# Altium PCB mdm3.PcbDoc (part 3 of 3)
Units mil, origin at the board's own origin, x right, y up, seen from the top; angles counter-clockwise.
Board outline 3925 x 3925 mil, 2 copper layers (TopLayer, BottomLayer); 80 components, 90 nets, 713 pads, 10 vias.
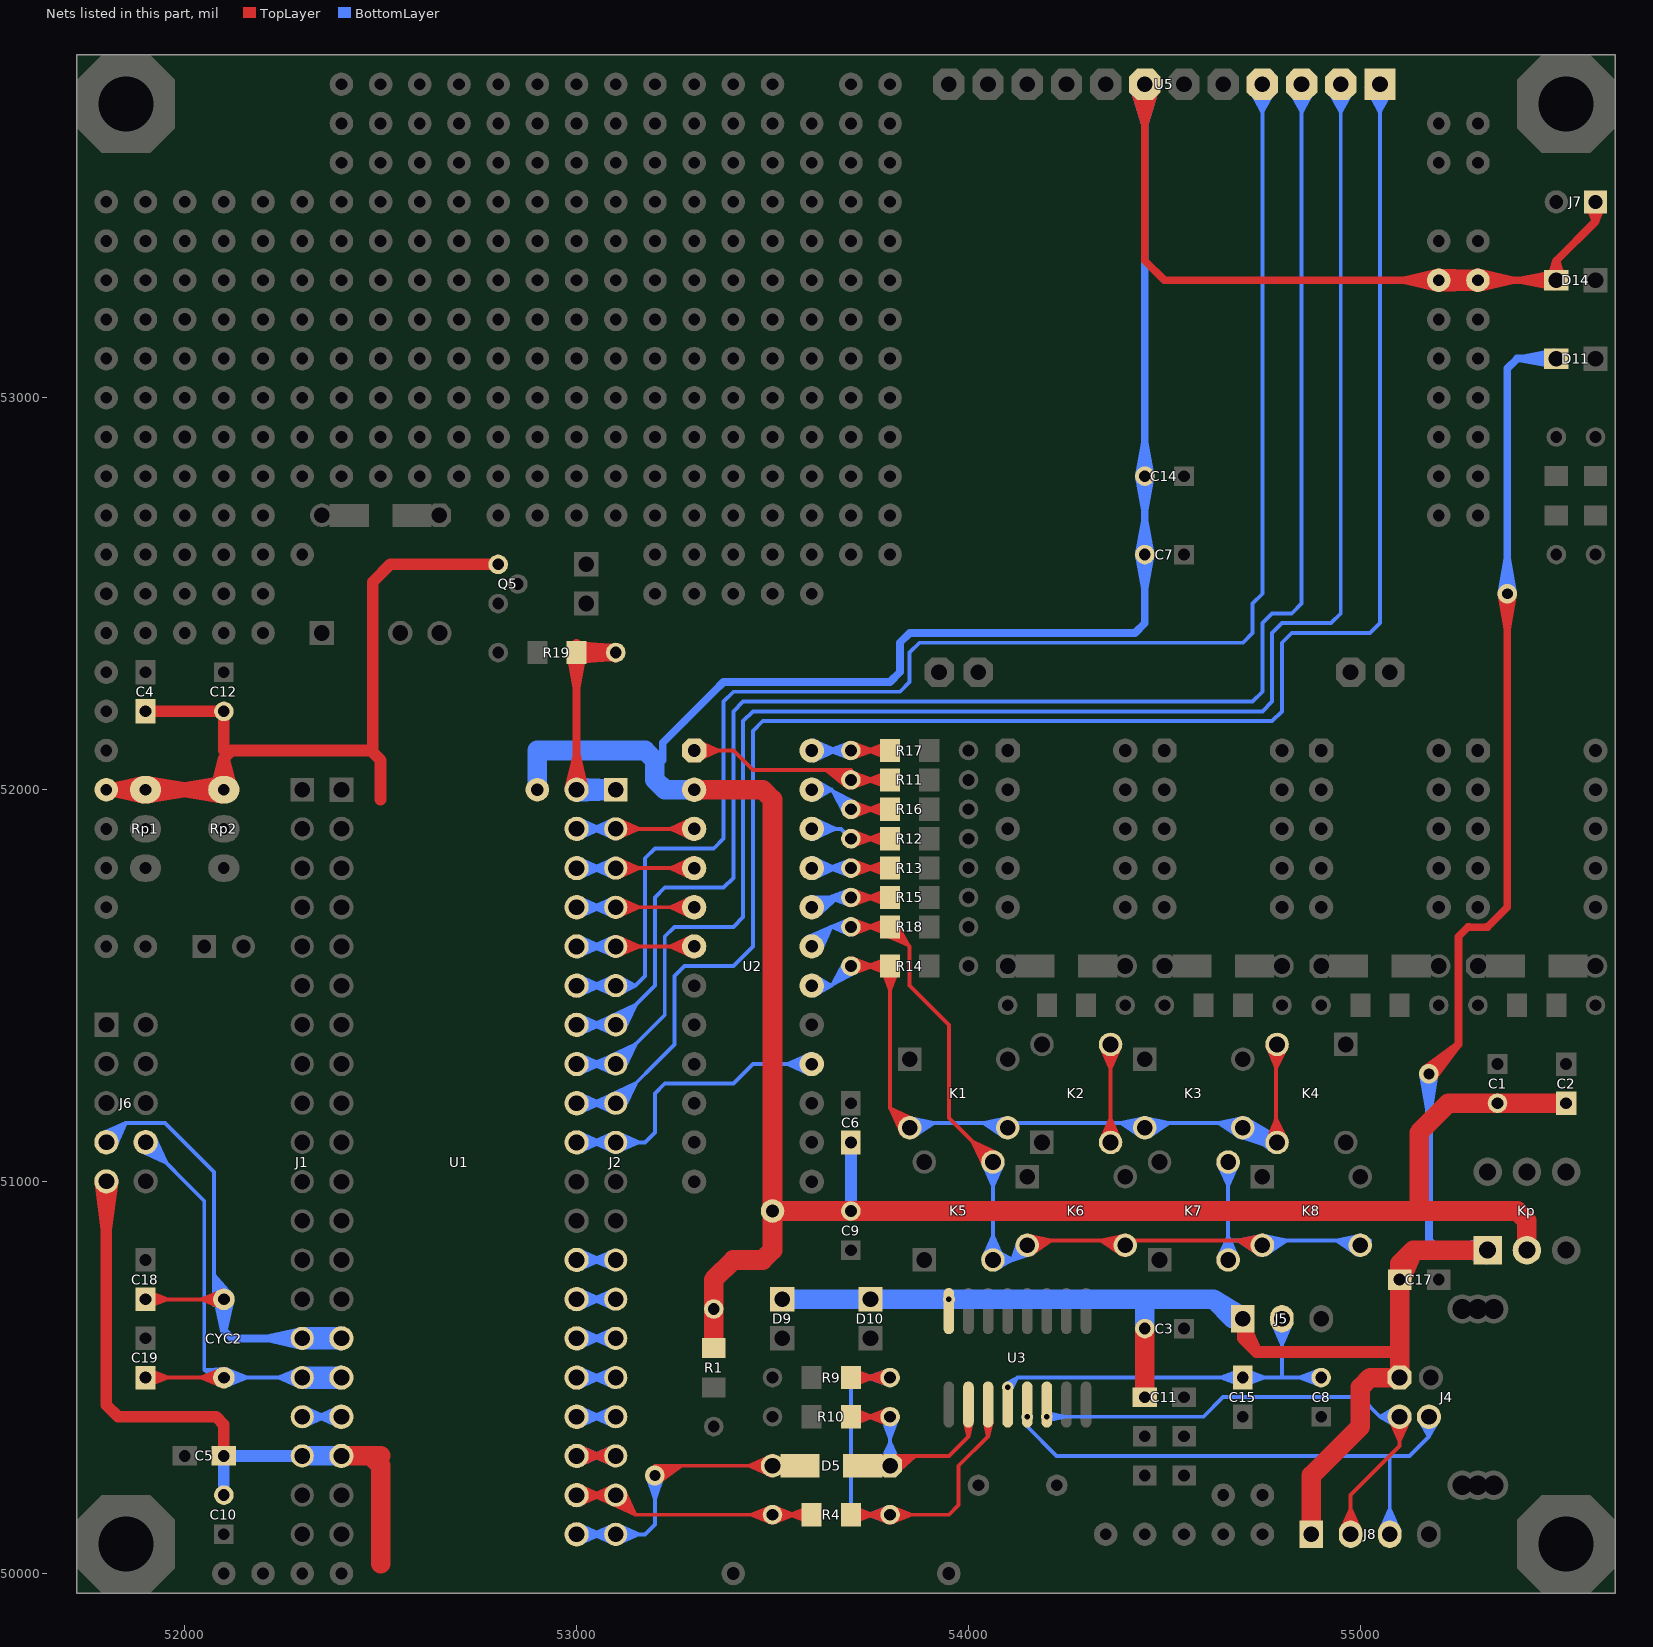
[diagram p3: the nets of this part, all layers, seen from the top]

## Via types
v1: diameter 30, hole 14, TopLayer to BottomLayer, 5 vias
v2: diameter 50, hole 28, TopLayer to BottomLayer, 5 vias

## Nets (pads, with @x,y where several pads share a name; then routed paths per layer and width w, separated by ;. In a path a pad name is that pad's centre, name@x,y a point inside that pad or via, vN(x,y) a via of type N, cw(c..) or ccw(c..) an arc to the next point about the centre after c; other vN are vias at no path point) (continued)
P16: C18.1 CYC2.2 J1.15 J6.7 U1.15 | length 3925
  TopLayer w10: C18.1@51900,50700 51956,50699.55 ; C18.1@51900.45,50699.55 CYC2.2@52100.07,50699.55 ; C18.1@51900.99,50689.04 51956,50699.55 ; C18.1@51901.17,50710.94 51956,50699.55 ; C18.1@51903.77,50679.34 51956,50699.55 ; C18.1@51904.1,50720.6 51956,50699.55 ; CYC2.2@52095.67,50677.48 52042.57,50699.55 ; CYC2.2@52095.67,50721.62 52042.57,50699.55 ; CYC2.2@52098.71,50687.12 52042.57,50699.55 ; CYC2.2@52098.71,50711.98 52042.57,50699.55
  BottomLayer w10: J6.7@51785.72,51122.03 51849.5,51149.5 ; J6.7@51790.38,51113.06 51849.5,51149.5 ; J6.7@51796.24,51104.93 51849.5,51149.5 ; J6.7@51800.21,51100 51800,51100 51849.5,51149.5 ; J6.7@51800.29,51100.5 51849.5,51149.5 ; J6.7@51804.7,51096.43 51849.5,51149.5 ; J6.7@51812.81,51090.54 51849.5,51149.5 ; J6.7@51821.76,51085.84 51849.5,51149.5 ; 52075,50685 52075,50825 52075,51025 52074.5,51025 51950,51149.5 51849.5,51149.5 ; CYC2.2@52078.09,50694.73 52075,50761.38 ; CYC2.2@52088.1,50695.96 52075,50761.38 ; CYC2.2@52100.07,50699.55 52075,50761.38 ; CYC2.2@52111.16,50705.31 52075,50761.38 ; CYC2.2@52119.2,50711.4 52075,50761.38
  BottomLayer w20: CYC2.2@52082.68,50697.63 52100.07,50619.93 ; CYC2.2@52117.46,50697.63 52100.07,50619.93 ; J1.15@52297.87,50580.59 52210.47,50600 J1.15@52297.87,50619.41 ; J1.15@52298.05,50580.57 U1.15@52388.31,50581.32 ; J1.15@52298.05,50619.43 U1.15@52388.31,50618.68 ; J1.15@52302.13,50580.59 52389.53,50600 J1.15@52302.13,50619.41 ; J1.15@52306.08,50581.44 U1.15@52388.31,50618.68 ; J1.15@52306.08,50618.56 U1.15@52388.31,50581.32 ; U1.15@52397.58,50579.14 52309,50600 U1.15@52397.58,50620.86 ; U1.15@52400,50600 J1.15@52300,50600 ; 52100.07,50619.93 CYC2.2@52100.07,50699.55 52100.07,50619.93 ; 52100.07,50619.93 52120,50600 J1.15@52300,50600 ; J1.15@52300,50600 U1.15@52388.31,50618.68 ; J1.15@52300,50600 U1.15@52388.31,50581.32
P17: C19.1 CYC2.1 J1.16 J6.8 U1.16 | length 3939.6
  TopLayer w10: C19.1@51900,50500 52099.62,50500 CYC2.1@52100.07,50499.55 52042.57,50500 ; C19.1@51901.08,50489.05 51956,50500 ; C19.1@51901.08,50510.95 51956,50500 ; C19.1@51903.94,50479.37 51956,50500 ; C19.1@51903.94,50520.63 51956,50500 ; CYC2.1@52095.5,50477.52 52042.57,50500 ; CYC2.1@52095.84,50521.65 52042.57,50500 ; CYC2.1@52098.61,50487.14 52042.57,50500 ; CYC2.1@52098.81,50511.99 52042.57,50500
  BottomLayer w10: J6.8@51885.43,51079.17 51952.5,51048.29 ; J6.8@51890.27,51088.03 51952.5,51048.29 ; J6.8@51896.22,51096.09 51952.5,51048.29 ; J6.8@51900,51100 J6.8@51900.79,51100 ; J6.8@51904.7,51104.57 51952.5,51048.29 ; J6.8@51912.76,51110.52 51952.5,51048.29 ; J6.8@51921.62,51115.36 51952.5,51048.29 ; 52050,50800 52050,50810 ; CYC2.1@52087.42,50480.95 52050,50520 ; CYC2.1@52094.04,50488.6 52050,50520 ; CYC2.1@52101.33,50511.99 52157.57,50500 ; CYC2.1@52101.53,50487.14 52157.57,50500 ; CYC2.1@52103.43,50511.59 52050,50520 ; CYC2.1@52104.06,50521.69 52050,50520 ; CYC2.1@52104.3,50521.65 52157.57,50500 ; CYC2.1@52104.64,50477.52 52157.57,50500 ; J1.16@52294.95,50476 52240.47,50500 ; J1.16@52294.95,50524 52240.47,50500 ; J1.16@52298.23,50485.58 52240.47,50500 ; J1.16@52298.23,50514.42 52240.47,50500 ; J1.16@52300,50500 CYC2.1@52099.62,50500 ; J6.8@51900.79,51100 52050,50950.79 52050,50810 ; J6.8@51900.79,51100 J6.8@51900.29,51100.5 51952.5,51048.29 ; 52050,50520 CYC2.1@52100.07,50499.55 ; 52050,50520 52070,50500 CYC2.1@52099.62,50500 ; 52050,50520 52050,50810 ; CYC2.1@52099.62,50500 CYC2.1@52100.07,50499.55 ; CYC2.1@52100.07,50499.55 52157.57,50500
  BottomLayer w20: J1.16@52298.05,50480.57 U1.16@52388.31,50481.32 ; J1.16@52298.05,50519.43 U1.16@52388.31,50518.68 ; J1.16@52302.13,50480.59 52389.53,50500 J1.16@52302.13,50519.41 ; J1.16@52306.08,50481.44 U1.16@52388.31,50518.68 ; J1.16@52306.08,50518.56 U1.16@52388.31,50481.32 ; U1.16@52397.58,50479.14 52309,50500 U1.16@52397.58,50520.86 ; U1.16@52400,50500 J1.16@52300,50500 ; J1.16@52300,50500 U1.16@52388.31,50481.32 ; J1.16@52300,50500 U1.16@52388.31,50518.68
P20: J2.9 U1.32 U5.1 | length 5770.8
  BottomLayer w10: U1.32@53000,51200 J2.9@53100,51200 53250,51350 53250,51525 53275,51550 53400,51550 53450,51600 53450,52025 53450,52150 53475,52175 54775,52175 54800,52200 54800,52375 54825,52400 55025,52400 55050,52425 U5.1@55050,53800 ; U1.32@53000.3,51194.01 53061,51200 ; U1.32@53000.3,51205.99 53061,51200 ; U1.32@53002.1,51184.14 53061,51200 ; U1.32@53002.1,51215.86 53061,51200 ; U1.32@53005.54,51174.6 53061,51200 ; U1.32@53005.54,51225.4 53061,51200 ; J2.9@53085.88,51220.05 53150.74,51250.74 ; J2.9@53090.82,51211.26 53150.74,51250.74 ; J2.9@53094.95,51176 53040.47,51200 ; J2.9@53094.95,51224 53040.47,51200 ; J2.9@53098.23,51185.58 53040.47,51200 ; J2.9@53098.23,51214.42 53040.47,51200 ; J2.9@53111.26,51190.82 53150.74,51250.74 ; J2.9@53120.05,51185.88 53150.74,51250.74 ; U5.1@55016.11,53791.25 55050,53730 ; U5.1@55025.4,53795.54 55050,53730 ; U5.1@55035.09,53798.39 55050,53730 ; U5.1@55064.91,53798.39 55050,53730 ; U5.1@55074.6,53795.54 55050,53730 ; U5.1@55083.89,53791.25 55050,53730
P21: J2.8 U1.33 U5.2 | length 5659.6
  BottomLayer w10: U1.33@53000,51300 J2.8@53100,51300 ; U1.33@53000.3,51294.01 53061,51300 ; U1.33@53000.3,51305.99 53061,51300 ; U1.33@53002.1,51284.14 53061,51300 ; U1.33@53002.1,51315.86 53061,51300 ; U1.33@53005.54,51274.6 53061,51300 ; U1.33@53005.54,51325.4 53061,51300 ; J2.8@53085.88,51320.05 53150.74,51350.74 ; J2.8@53090.82,51311.26 53150.74,51350.74 ; J2.8@53094.95,51276 53040.47,51300 ; J2.8@53094.95,51324 53040.47,51300 ; J2.8@53098.23,51285.58 53040.47,51300 ; J2.8@53098.23,51314.42 53040.47,51300 ; J2.8@53111.26,51290.82 53150.74,51350.74 ; J2.8@53120.05,51285.88 53150.74,51350.74 ; U5.2@54916.11,53791.25 54950,53730 ; U5.2@54925.4,53795.54 54950,53730 ; U5.2@54935.09,53798.39 54950,53730 ; U5.2@54950,53800 54950,52450 54925,52425 54800,52425 54775,52400 54775,52225 54750,52200 53450,52200 53425,52175 53425,51675 53400,51650 53250,51650 53225,51625 53225,51425 J2.8@53100,51300 ; U5.2@54964.91,53798.39 54950,53730 ; U5.2@54974.6,53795.54 54950,53730 ; U5.2@54983.89,53791.25 54950,53730 ; 53040.47,51300 J2.8@53100,51300
P22: J2.7 U1.34 U5.3 | length 5474.2
  BottomLayer w10: U1.34@53000,51400 J2.7@53100,51400 ; U1.34@53000.3,51394.01 53061,51400 ; U1.34@53000.3,51405.99 53061,51400 ; U1.34@53002.1,51384.14 53061,51400 ; U1.34@53002.1,51415.86 53061,51400 ; U1.34@53005.54,51374.6 53061,51400 ; U1.34@53005.54,51425.4 53061,51400 ; J2.7@53085.88,51420.05 53150.74,51450.74 ; J2.7@53090.82,51411.26 53150.74,51450.74 ; J2.7@53094.95,51376 53040.47,51400 ; J2.7@53094.95,51424 53040.47,51400 ; J2.7@53098.23,51385.58 53040.47,51400 ; J2.7@53098.23,51414.42 53040.47,51400 ; J2.7@53111.26,51390.82 53150.74,51450.74 ; J2.7@53120.05,51385.88 53150.74,51450.74 ; U5.3@54816.11,53791.25 54850,53730 ; U5.3@54825.4,53795.54 54850,53730 ; U5.3@54835.09,53798.39 54850,53730 ; U5.3@54850,53800 54850,52475 54825,52450 54775,52450 54750,52425 54750,52250 54725,52225 53425,52225 53400,52200 53400,51775 53375,51750 53225,51750 53200,51725 53200,51500 J2.7@53100,51400 ; U5.3@54864.91,53798.39 54850,53730 ; U5.3@54874.6,53795.54 54850,53730 ; U5.3@54883.89,53791.25 54850,53730 ; 53040.47,51400 J2.7@53100,51400
P23: J2.6 U1.35 U5.4 | length 5216.5
  BottomLayer w10: U1.35@53000,51500 J2.6@53100,51500 ; U1.35@53000.3,51494.01 53061,51500 ; U1.35@53000.3,51505.99 53061,51500 ; U1.35@53002.1,51484.14 53061,51500 ; U1.35@53002.1,51515.86 53061,51500 ; U1.35@53005.54,51474.6 53061,51500 ; U1.35@53005.54,51525.4 53061,51500 ; J2.6@53094.95,51476 53040.47,51500 ; J2.6@53094.95,51524 53040.47,51500 ; J2.6@53098.23,51485.58 53040.47,51500 ; J2.6@53098.23,51514.42 53040.47,51500 ; J2.6@53102.11,51485.63 53150,51500 ; J2.6@53102.11,51514.37 53150,51500 ; J2.6@53106.02,51476.22 53150,51500 ; J2.6@53106.02,51523.78 53150,51500 ; U5.4@54716.11,53791.25 54750,53730 ; U5.4@54725.4,53795.54 54750,53730 ; U5.4@54735.09,53798.39 54750,53730 ; U5.4@54750,53800 54750,52500 54725,52475 54725,52400 54700,52375 53875,52375 53850,52350 53850,52275 53825,52250 53400,52250 53375,52225 53375,51875 53350,51850 53200,51850 53175,51825 53175,51525 53150,51500 ; U5.4@54764.91,53798.39 54750,53730 ; U5.4@54774.6,53795.54 54750,53730 ; U5.4@54783.89,53791.25 54750,53730 ; 53040.47,51500 J2.6@53100,51500 ; J2.6@53100,51500 53150,51500
P24: J2.5 U1.36 U2.6 | length 1508.2
  TopLayer w10: J2.5@53100,51600 U2.6@53300,51600 ; J2.5@53101.77,51585.58 53159.53,51600 ; J2.5@53101.77,51614.42 53159.53,51600 ; J2.5@53105.05,51576 53159.53,51600 ; J2.5@53105.05,51624 53159.53,51600 ; U2.6@53294.46,51574.6 53239,51600 ; U2.6@53294.46,51625.4 53239,51600 ; U2.6@53297.9,51584.14 53239,51600 ; U2.6@53297.9,51615.86 53239,51600 ; U2.6@53299.7,51594.01 53239,51600 ; U2.6@53299.7,51605.99 53239,51600
  BottomLayer w10: U1.36@53000,51600 J2.5@53100,51600 ; U1.36@53000.3,51594.01 53061,51600 ; U1.36@53000.3,51605.99 53061,51600 ; U1.36@53002.1,51584.14 53061,51600 ; U1.36@53002.1,51615.86 53061,51600 ; U1.36@53005.54,51574.6 53061,51600 ; U1.36@53005.54,51625.4 53061,51600 ; J2.5@53094.95,51576 53040.47,51600 ; J2.5@53094.95,51624 53040.47,51600 ; J2.5@53098.23,51585.58 53040.47,51600 ; J2.5@53098.23,51614.42 53040.47,51600
P25: J2.4 U1.37 U2.5 | length 1508.2
  TopLayer w10: J2.4@53100,51700 U2.5@53300,51700 ; J2.4@53101.77,51685.58 53159.53,51700 ; J2.4@53101.77,51714.42 53159.53,51700 ; J2.4@53105.05,51676 53159.53,51700 ; J2.4@53105.05,51724 53159.53,51700 ; U2.5@53294.46,51674.6 53239,51700 ; U2.5@53294.46,51725.4 53239,51700 ; U2.5@53297.9,51684.14 53239,51700 ; U2.5@53297.9,51715.86 53239,51700 ; U2.5@53299.7,51694.01 53239,51700 ; U2.5@53299.7,51705.99 53239,51700
  BottomLayer w10: U1.37@53000,51700 J2.4@53100,51700 ; U1.37@53000.3,51694.01 53061,51700 ; U1.37@53000.3,51705.99 53061,51700 ; U1.37@53002.1,51684.14 53061,51700 ; U1.37@53002.1,51715.86 53061,51700 ; U1.37@53005.54,51674.6 53061,51700 ; U1.37@53005.54,51725.4 53061,51700 ; J2.4@53094.95,51676 53040.47,51700 ; J2.4@53094.95,51724 53040.47,51700 ; J2.4@53098.23,51685.58 53040.47,51700 ; J2.4@53098.23,51714.42 53040.47,51700
P26: J2.3 U1.38 U2.4 | length 1564.2
  TopLayer w10: J2.3@53100,51800 U2.4@53295,51800 ; J2.3@53101.77,51785.58 53159.53,51800 ; J2.3@53101.77,51814.42 53159.53,51800 ; J2.3@53105.05,51776 53159.53,51800 ; J2.3@53105.05,51824 53159.53,51800 ; U2.4@53294.46,51774.6 53239,51800 ; U2.4@53294.46,51825.4 53239,51800 ; U2.4@53297.9,51784.14 53239,51800 ; U2.4@53297.9,51815.86 53239,51800 ; U2.4@53299.7,51794.01 53239,51800 ; U2.4@53299.7,51805.99 53239,51800 ; U2.4@53300,51800 53239,51800
  BottomLayer w10: U1.38@53000,51800 J2.3@53100,51800 ; U1.38@53000.3,51794.01 53061,51800 ; U1.38@53000.3,51805.99 53061,51800 ; U1.38@53002.1,51784.14 53061,51800 ; U1.38@53002.1,51815.86 53061,51800 ; U1.38@53005.54,51774.6 53061,51800 ; U1.38@53005.54,51825.4 53061,51800 ; J2.3@53094.95,51776 53040.47,51800 ; J2.3@53094.95,51824 53040.47,51800 ; J2.3@53098.23,51785.58 53040.47,51800 ; J2.3@53098.23,51814.42 53040.47,51800
P27: J2.2 U1.39 U2.3 | length 1508.2
  TopLayer w10: J2.2@53100,51900 U2.3@53300,51900 ; J2.2@53101.77,51885.58 53159.53,51900 ; J2.2@53101.77,51914.42 53159.53,51900 ; J2.2@53105.05,51876 53159.53,51900 ; J2.2@53105.05,51924 53159.53,51900 ; U2.3@53294.46,51874.6 53239,51900 ; U2.3@53294.46,51925.4 53239,51900 ; U2.3@53297.9,51884.14 53239,51900 ; U2.3@53297.9,51915.86 53239,51900 ; U2.3@53299.7,51894.01 53239,51900 ; U2.3@53299.7,51905.99 53239,51900
  BottomLayer w10: U1.39@53000,51900 J2.2@53100,51900 ; U1.39@53000.3,51894.01 53061,51900 ; U1.39@53000.3,51905.99 53061,51900 ; U1.39@53002.1,51884.14 53061,51900 ; U1.39@53002.1,51915.86 53061,51900 ; U1.39@53005.54,51874.6 53061,51900 ; U1.39@53005.54,51925.4 53061,51900 ; J2.2@53094.95,51876 53040.47,51900 ; J2.2@53094.95,51924 53040.47,51900 ; J2.2@53098.23,51885.58 53040.47,51900 ; J2.2@53098.23,51914.42 53040.47,51900
P32: J2.18 U1.23 | length 1408.2
  TopLayer w10: U1.23@53000,50300 J2.18@53100,50300 ; U1.23@53000.3,50294.01 53061,50300 ; U1.23@53000.3,50305.99 53061,50300 ; U1.23@53002.1,50284.14 53061,50300 ; U1.23@53002.1,50315.86 53061,50300 ; U1.23@53005.54,50274.6 53061,50300 ; U1.23@53005.54,50325.4 53061,50300 ; J2.18@53094.95,50276 53040.47,50300 ; J2.18@53094.95,50324 53040.47,50300 ; J2.18@53098.23,50285.58 53040.47,50300 ; J2.18@53098.23,50314.42 53040.47,50300
  BottomLayer w10: U1.23@53000,50300 J2.18@53100,50300 ; U1.23@53000.3,50294.01 53061,50300 ; U1.23@53000.3,50305.99 53061,50300 ; U1.23@53002.1,50284.14 53061,50300 ; U1.23@53002.1,50315.86 53061,50300 ; U1.23@53005.54,50274.6 53061,50300 ; U1.23@53005.54,50325.4 53061,50300 ; J2.18@53094.95,50276 53040.47,50300 ; J2.18@53094.95,50324 53040.47,50300 ; J2.18@53098.23,50285.58 53040.47,50300 ; J2.18@53098.23,50314.42 53040.47,50300
P33: J2.17 U1.24 | length 704.1
  BottomLayer w10: U1.24@53000,50400 J2.17@53100,50400 ; U1.24@53000.3,50394.01 53061,50400 ; U1.24@53000.3,50405.99 53061,50400 ; U1.24@53002.1,50384.14 53061,50400 ; U1.24@53002.1,50415.86 53061,50400 ; U1.24@53005.54,50374.6 53061,50400 ; U1.24@53005.54,50425.4 53061,50400 ; J2.17@53094.95,50376 53040.47,50400 ; J2.17@53094.95,50424 53040.47,50400 ; J2.17@53098.23,50385.58 53040.47,50400 ; J2.17@53098.23,50414.42 53040.47,50400
P34: J2.16 U1.25 | length 704.1
  BottomLayer w10: U1.25@53000,50500 J2.16@53100,50500 ; U1.25@53000.3,50494.01 53061,50500 ; U1.25@53000.3,50505.99 53061,50500 ; U1.25@53002.1,50484.14 53061,50500 ; U1.25@53002.1,50515.86 53061,50500 ; U1.25@53005.54,50474.6 53061,50500 ; U1.25@53005.54,50525.4 53061,50500 ; J2.16@53094.95,50476 53040.47,50500 ; J2.16@53094.95,50524 53040.47,50500 ; J2.16@53098.23,50485.58 53040.47,50500 ; J2.16@53098.23,50514.42 53040.47,50500
P35: J2.15 U1.26 | length 704.1
  BottomLayer w10: U1.26@53000,50600 J2.15@53100,50600 ; U1.26@53000.3,50594.01 53061,50600 ; U1.26@53000.3,50605.99 53061,50600 ; U1.26@53002.1,50584.14 53061,50600 ; U1.26@53002.1,50615.86 53061,50600 ; U1.26@53005.54,50574.6 53061,50600 ; U1.26@53005.54,50625.4 53061,50600 ; J2.15@53094.95,50576 53040.47,50600 ; J2.15@53094.95,50624 53040.47,50600 ; J2.15@53098.23,50585.58 53040.47,50600 ; J2.15@53098.23,50614.42 53040.47,50600
P36: J2.14 U1.27 | length 704.1
  BottomLayer w10: U1.27@53000,50700 J2.14@53100,50700 ; U1.27@53000.3,50694.01 53061,50700 ; U1.27@53000.3,50705.99 53061,50700 ; U1.27@53002.1,50684.14 53061,50700 ; U1.27@53002.1,50715.86 53061,50700 ; U1.27@53005.54,50674.6 53061,50700 ; U1.27@53005.54,50725.4 53061,50700 ; J2.14@53094.95,50676 53040.47,50700 ; J2.14@53094.95,50724 53040.47,50700 ; J2.14@53098.23,50685.58 53040.47,50700 ; J2.14@53098.23,50714.42 53040.47,50700
P37: J2.13 U1.28 | length 704.1
  BottomLayer w10: U1.28@53000,50800 J2.13@53100,50800 ; U1.28@53000.3,50794.01 53061,50800 ; U1.28@53000.3,50805.99 53061,50800 ; U1.28@53002.1,50784.14 53061,50800 ; U1.28@53002.1,50815.86 53061,50800 ; U1.28@53005.54,50774.6 53061,50800 ; U1.28@53005.54,50825.4 53061,50800 ; J2.13@53094.95,50776 53040.47,50800 ; J2.13@53094.95,50824 53040.47,50800 ; J2.13@53098.23,50785.58 53040.47,50800 ; J2.13@53098.23,50814.42 53040.47,50800
P44: J2.10 U1.31 U2.16 | length 1949.6
  BottomLayer w10: U1.31@53000,51100 J2.10@53100,51100 53175,51100 53200,51125 53200,51225 53225,51250 53400,51250 53450,51300 U2.16@53600,51300 ; U1.31@53000.3,51094.01 53061,51100 ; U1.31@53000.3,51105.99 53061,51100 ; U1.31@53002.1,51084.14 53061,51100 ; U1.31@53002.1,51115.86 53061,51100 ; U1.31@53005.54,51074.6 53061,51100 ; U1.31@53005.54,51125.4 53061,51100 ; J2.10@53094.95,51076 53040.47,51100 ; J2.10@53094.95,51124 53040.47,51100 ; J2.10@53098.23,51085.58 53040.47,51100 ; J2.10@53098.23,51114.42 53040.47,51100 ; J2.10@53101.77,51085.58 53159.53,51100 ; J2.10@53101.77,51114.42 53159.53,51100 ; J2.10@53105.05,51076 53159.53,51100 ; J2.10@53105.05,51124 53159.53,51100 ; U2.16@53594.46,51274.6 53539,51300 ; U2.16@53594.46,51325.4 53539,51300 ; U2.16@53597.9,51284.14 53539,51300 ; U2.16@53597.9,51315.86 53539,51300 ; U2.16@53599.7,51294.01 53539,51300 ; U2.16@53599.7,51305.99 53539,51300
P45: J2.1 R19.2 R19.4 U1.40 | length 2779.7
  TopLayer w20: U1.40@52979.14,52002.42 53000,52091 U1.40@53020.86,52002.42 ; R19.4@52984.47,52344.64 53000,52260.47 ; R19.4@52999.85,52330.47 R19.2@53085.17,52337.47 ; R19.4@52999.85,52369.53 R19.2@53085.17,52362.53 ; U1.40@53000,52000 R19.4@53000,52375 ; R19.4@53000,52350 R19.2@53100,52350 ; R19.4@53000,52353.94 R19.2@53085.17,52362.53 ; R19.4@53001.42,52334.47 53085.59,52350 R19.4@53001.42,52365.53 ; R19.4@53002.97,52338.63 R19.2@53085.17,52362.53 ; R19.4@53002.97,52361.37 R19.2@53085.17,52337.47 ; R19.4@53015.53,52344.64 53000,52260.47 ; R19.2@53098.68,52335.06 53015,52350 R19.2@53098.68,52364.94 ; 53000,52260.47 53000,52346.06 R19.2@53085.17,52337.47
  BottomLayer w20: U1.40@52998.34,51979.07 J2.1@53089.96,51982.35 ; U1.40@52998.34,52020.93 J2.1@53089.96,52017.65 ; U1.40@53002.42,51979.14 53091,52000 U1.40@53002.42,52020.86 ; U1.40@53006.38,51979.99 J2.1@53089.96,52017.65 ; U1.40@53006.38,52020.01 J2.1@53089.96,51982.35 ; J2.1@53097.87,51980.59 53010.47,52000 J2.1@53097.87,52019.41 ; J2.1@53100,52000 U1.40@53000,52000 ; U1.40@53000,52000 J2.1@53089.96,52017.65 ; U1.40@53000,52000 J2.1@53089.96,51982.35
P54: J1.17 U1.17 | length 704.1
  BottomLayer w10: J1.17@52300,50400 U1.17@52400,50400 ; J1.17@52301.77,50385.58 52359.53,50400 ; J1.17@52301.77,50414.42 52359.53,50400 ; J1.17@52305.05,50376 52359.53,50400 ; J1.17@52305.05,50424 52359.53,50400 ; U1.17@52394.46,50374.6 52339,50400 ; U1.17@52394.46,50425.4 52339,50400 ; U1.17@52397.9,50384.14 52339,50400 ; U1.17@52397.9,50415.86 52339,50400 ; U1.17@52399.7,50394.01 52339,50400 ; U1.17@52399.7,50405.99 52339,50400
RX: D5.1 D5.3 R10.1 R10.3 U3.2 | length 2294.7
  TopLayer w10: R10.3@53700,50400 R10.1@53800,50400 ; R10.3@53701.01,50389.46 53755.59,50400 ; R10.3@53701.01,50410.54 53755.59,50400 ; R10.3@53703.81,50379.77 53755.59,50400 ; R10.3@53703.81,50420.23 53755.59,50400 ; D5.3@53746.39,50299.19 53824.95,50300 ; D5.3@53747.14,50289.14 53824.95,50300 ; D5.3@53750.47,50275 53824.95,50300 ; D5.3@53756.35,50261.71 53824.95,50300 ; D5.3@53761.81,50253.25 53824.95,50300 ; D5.3@53775,50300 53950,50300 54000,50350 ; D5.1@53795.26,50299.55 53863.52,50300 ; D5.1@53796.07,50289.48 53863.52,50300 ; R10.1@53796.36,50380.33 53745,50400 ; R10.1@53796.36,50419.67 53745,50400 ; R10.1@53799.09,50390.04 53745,50400 ; R10.1@53799.09,50409.96 53745,50400 ; D5.1@53800,50275 53863.52,50300 ; D5.1@53806.99,50261.73 53863.52,50300 ; D5.1@53813.26,50253.81 53863.52,50300 ; U3.2@53991.56,50384.48 54000,50350 ; U3.2@54000,50385.5 54000,50350 ; U3.2@54000,50431 54000,50350 ; U3.2@54008.44,50384.48 54000,50350
  BottomLayer w10: D5.1@53775.55,50280.21 53800,50335 ; R10.1@53780.33,50396.36 53800,50345 ; D5.1@53785.12,50276.88 53800,50335 ; R10.1@53790.04,50399.09 53800,50345 ; D5.1@53800,50275 R10.1@53800,50400 ; R10.1@53809.96,50399.09 53800,50345 ; D5.1@53814.88,50276.88 53800,50335 ; R10.1@53819.67,50396.36 53800,50345 ; D5.1@53824.45,50280.21 53800,50335
RXD: D5.2 D5.4 J2.20 U1.21 | length 2310
  TopLayer w10: v2@53195.68,50269.53 53266.76,50275 ; v2@53197.16,50259.59 53266.76,50275 ; v2(53200,50250) 53266.76,50275 ; 53200,50275 D5.2@53500,50275 ; v2@53204.16,50240.9 53266.76,50275 ; v2@53209.57,50232.44 53266.76,50275 ; D5.2@53494.79,50250.55 53440,50275 ; D5.2@53494.79,50299.45 53440,50275 ; D5.2@53498.12,50260.12 53440,50275 ; D5.2@53498.12,50289.88 53440,50275
  BottomLayer w10: U1.21@53000,50100 J2.20@53100,50100 53175,50100 53200,50125 v2(53200,50250) ; U1.21@53000.3,50094.01 53061,50100 ; U1.21@53000.3,50105.99 53061,50100 ; U1.21@53002.1,50084.14 53061,50100 ; U1.21@53002.1,50115.86 53061,50100 ; U1.21@53005.54,50074.6 53061,50100 ; U1.21@53005.54,50125.4 53061,50100 ; J2.20@53094.95,50076 53040.47,50100 ; J2.20@53094.95,50124 53040.47,50100 ; J2.20@53098.23,50085.58 53040.47,50100 ; J2.20@53098.23,50114.42 53040.47,50100 ; J2.20@53101.77,50085.58 53159.53,50100 ; J2.20@53101.77,50114.42 53159.53,50100 ; J2.20@53105.05,50076 53159.53,50100 ; J2.20@53105.05,50124 53159.53,50100 ; v2@53180.29,50246.61 53200,50191 ; v2@53190.04,50249.15 53200,50191 ; v2@53209.96,50249.15 53200,50191 ; v2@53219.71,50246.61 53200,50191
SEG0: K1.2 K1.3 K2.2 K2.3 K3.2 K3.3 K4.2 K4.3 R14.1 R14.3 U2.18 | length 9100.5
  TopLayer w10: R14.1@53700,51550 R14.3@53800,51550 ; R14.1@53700.91,51540.04 53755,51550 ; R14.1@53700.91,51559.96 53755,51550 ; R14.1@53703.64,51530.33 53755,51550 ; R14.1@53703.64,51569.67 53755,51550 ; R14.3@53775,51550 53800,51525 53800,51187.5 ; R14.3@53779.77,51542.25 53800,51490.47 ; R14.3@53789.46,51545.05 53800,51490.47 ; R14.3@53796.19,51529.77 53744.41,51550 ; R14.3@53796.19,51570.23 53744.41,51550 ; R14.3@53798.99,51539.46 53744.41,51550 ; R14.3@53798.99,51560.54 53744.41,51550 ; R14.3@53800,51546.06 53800,51490.47 ; R14.3@53810.54,51545.05 53800,51490.47 ; R14.3@53820.23,51542.25 53800,51490.47 ; K1.2@53829.48,51123.23 53800,51187.5 ; K1.2@53838.33,51128.08 53800,51187.5 ; K1.2@53850,51137.5 53800,51187.5 ; K1.2@53859.42,51149.17 53800,51187.5 ; K1.2@53864.27,51158.02 53800,51187.5 ; K2.2@54338.05,51105.21 54362.5,51160 ; K2.3@54338.05,51344.79 54362.5,51290 ; K2.2@54347.62,51101.88 54362.5,51160 ; K2.3@54347.62,51348.12 54362.5,51290 ; K2.2@54362.5,51100 K2.3@54362.5,51350 ; K2.2@54377.38,51101.88 54362.5,51160 ; K2.3@54377.38,51348.12 54362.5,51290 ; K2.2@54386.95,51105.21 54362.5,51160 ; K2.3@54386.95,51344.79 54362.5,51290 ; K4.3@54762.85,51104.17 54785,51160.16 ; K4.2@54762.85,51345.82 54785,51289.95 ; K4.3@54772.55,51101.25 54785,51160.16 ; K4.2@54772.55,51348.75 54785,51289.95 ; K4.3@54785,51115 K4.2@54785,51365 ; K4.3@54787.5,51100 54785,51160.16 ; K4.2@54787.5,51350 54785,51289.95 ; K4.3@54802.29,51102.48 54785,51160.16 ; K4.2@54802.29,51347.51 54785,51289.95 ; K4.3@54811.72,51106.2 54785,51160.16 ; K4.2@54811.72,51343.79 54785,51289.95
  BottomLayer w10: U2.18@53600,51500 53650,51500 ; U2.18@53600.36,51494.01 53650,51500 ; U2.18@53600.36,51505.99 53650,51500 ; U2.18@53602.56,51484.21 53650,51500 ; U2.18@53602.56,51515.79 53650,51500 ; U2.18@53606.76,51474.89 53650,51500 ; U2.18@53606.76,51525.11 53650,51500 ; R14.1@53683.86,51561.81 53653.79,51503.79 ; R14.1@53692.41,51556.51 53653.79,51503.79 ; R14.1@53706.51,51542.41 53653.79,51503.79 ; R14.1@53711.81,51533.86 53653.79,51503.79 ; K1.2@53848.8,51152.45 53912.19,51150 ; K1.2@53850,51137.5 53912.19,51150 ; K1.2@53850,51150 54300,51150 K3.3@54700,51150 ; K1.2@53850,51162.5 53912.19,51150 ; K1.2@53854.67,51123.25 53912.19,51150 ; K1.2@53859.66,51114.44 53912.19,51150 ; K1.3@54090.31,51114.46 54038.05,51150 ; K1.3@54095.31,51123.25 54038.05,51150 ; K1.3@54100,51137.5 54038.05,51150 ; K1.3@54100,51162.5 54038.05,51150 ; K1.3@54101.2,51152.45 54038.05,51150 ; K2.2@54338.29,51106.25 54362.5,51150 ; K2.2@54347.67,51102.25 54362.5,51150 ; K2.2@54362.5,51100 54362.5,51150 ; K2.2@54377.33,51102.25 54362.5,51150 ; K2.2@54386.71,51106.25 54362.5,51150 ; K3.2@54440.26,51114.48 54388.38,51150 ; K3.2@54445.29,51123.26 54388.38,51150 ; K3.2@54448.8,51152.45 54511.95,51150 ; K3.2@54451.21,51152.45 54388.38,51150 ; K3.2@54454.69,51123.25 54511.95,51150 ; K3.2@54459.69,51114.46 54511.95,51150 ; K3.3@54688.17,51115.47 54753.42,51094.62 ; K3.3@54689.97,51114.6 54757.43,51098.7 ; K3.3@54690.33,51114.44 54637.85,51150 ; K3.3@54691.95,51124.84 54753.42,51094.62 ; K3.3@54692.98,51113.51 K4.3@54765.11,51105.43 ; K3.3@54693,51124.24 54757.43,51098.7 ; K3.3@54694.8,51123.43 K4.3@54765.11,51105.43 ; K3.3@54695,51115 K4.3@54785,51115 ; K3.3@54695.32,51123.25 54637.85,51150 ; K3.3@54696.13,51112.8 K4.3@54762.91,51115 ; K3.3@54696.54,51112.74 K4.3@54771.21,51114.92 ; K3.3@54696.57,51122.9 K4.3@54762.91,51115 ; K3.3@54696.92,51122.82 K4.3@54771.21,51114.92 ; K3.3@54698.52,51122.57 K4.3@54773.85,51122.65 ; K3.3@54699.21,51112.51 K4.3@54773.85,51122.65 ; K3.3@54700,51162.5 54637.85,51150 ; K3.3@54701.2,51152.45 54637.85,51150 ; K3.3@54704.41,51151.84 K4.3@54773.85,51122.65 ; K3.3@54705.95,51151.27 K4.3@54771.21,51114.92 ; K3.3@54706.61,51150.97 K4.3@54762.91,51115 ; K3.3@54707.98,51150.2 K4.3@54765.11,51105.43 ; K3.3@54708.93,51160.85 K4.3@54773.85,51122.65 ; K3.3@54709.69,51148.95 54757.43,51098.7 ; K3.3@54710.61,51148.1 54753.42,51094.62 ; K3.3@54711.44,51159.73 K4.3@54771.21,51114.92 ; K3.3@54712.67,51159.05 K4.3@54762.91,51115 ; K3.3@54714.74,51157.69 K4.3@54765.11,51105.43 ; K3.3@54717.5,51155.35 54757.43,51098.7 ; K3.3@54718.94,51153.81 54753.42,51094.62 ; K4.3@54776.94,51077.34 54725.69,51115 ; K4.3@54782.27,51085.94 54725.69,51115 ; K4.3@54787.5,51100 54725.69,51115 ; K4.3@54788.51,51124.98 54725.69,51115 ; K4.3@54789.29,51114.89 54725.69,51115 ; 53650,51500 R14.1@53700,51550 53653.79,51503.79 ; 54388.38,51150 K3.2@54450,51137.5 54511.95,51150 ; 54388.38,51150 54450,51162.5 54511.95,51150 ; 54637.85,51150 K3.3@54700,51137.5 ; K3.3@54700,51137.5 K4.3@54762.91,51115 ; K3.3@54700,51137.5 K4.3@54765.11,51105.43 ; K3.3@54700,51137.5 K4.3@54771.21,51114.92 ; K3.3@54700,51137.5 54757.43,51098.7 ; K3.3@54700,51137.5 K4.3@54773.85,51122.65 ; K3.3@54700,51137.5 54753.42,51094.62
SEG1: K5.2 K5.3 K6.2 K6.3 K7.2 K7.3 K8.2 K8.3 R18.1 R18.3 U2.19 | length 8057.1
  TopLayer w10: R18.1@53700,51650 R18.3@53800,51650 ; R18.1@53700.91,51640.04 53755,51650 ; R18.1@53700.91,51659.96 53755,51650 ; R18.1@53703.64,51630.33 53755,51650 ; R18.1@53703.64,51669.67 53755,51650 ; R18.3@53788.74,51628.82 53846.8,51603.2 ; R18.3@53791.94,51627.12 53826.33,51623.67 ; R18.3@53793.52,51637.68 53846.8,51603.2 ; R18.3@53794.46,51637.04 53826.33,51623.67 ; R18.3@53796.19,51629.77 53744.41,51650 ; R18.3@53796.19,51670.23 53744.41,51650 ; R18.3@53798.99,51639.46 53744.41,51650 ; R18.3@53798.99,51660.54 53744.41,51650 ; R18.3@53807.78,51653.25 53846.8,51603.2 ; R18.3@53808.02,51652.98 53826.33,51623.67 ; R18.3@53816.19,51658.79 53846.8,51603.2 ; R18.3@53817.41,51657.06 53826.33,51623.67 ; K5.3@54042.04,51035.64 54011.29,51101.21 ; K5.3@54050.85,51040.55 54011.29,51101.21 ; K5.3@54071.95,51061.65 54011.29,51101.21 ; K5.3@54076.86,51070.46 54011.29,51101.21 ; K6.2@54148.8,50852.45 54211.95,50850 ; K6.2@54150,50837.5 54211.95,50850 ; K6.2@54150,50850 54400,50850 K8.2@54750,50850 ; K6.2@54150,50862.5 54211.95,50850 ; K6.2@54154.69,50823.25 54211.95,50850 ; K6.2@54159.69,50814.46 54211.95,50850 ; K6.3@54390.31,50814.46 54338.05,50850 ; K6.3@54395.31,50823.25 54338.05,50850 ; K6.3@54400,50837.5 54338.05,50850 ; K6.3@54400,50862.5 54338.05,50850 ; K6.3@54401.2,50852.45 54338.05,50850 ; K8.2@54740.33,50814.45 54687.9,50850 ; K8.2@54745.32,50823.25 54687.9,50850 ; K8.2@54750,50837.5 54687.9,50850 ; K8.2@54750,50862.5 54687.9,50850 ; K8.2@54751.2,50852.45 54687.9,50850 ; R18.3@53800,51650 53850,51600 53850,51500 53950,51400 53950,51162.5 K5.3@54062.5,51050 54011.29,51101.21 ; R18.3@53800,51650 53800,51625 53825,51625 53826.33,51623.67 ; 53826.33,51623.67 53800,51646.06 53846.8,51603.2
  BottomLayer w10: U2.19@53585.31,51621.45 53650,51650 ; U2.19@53590.04,51612.52 53650,51650 ; U2.19@53595.94,51604.42 53650,51650 ; U2.19@53600,51600 53650,51650 ; U2.19@53604.42,51595.94 53650,51650 ; U2.19@53612.52,51590.04 53650,51650 ; U2.19@53621.45,51585.31 53650,51650 ; R18.1@53696,51630.4 53650,51650 ; R18.1@53696,51669.6 53650,51650 ; R18.1@53699,51640.05 53650,51650 ; R18.1@53699,51659.95 53650,51650 ; K5.2@54038.05,50805.21 54062.5,50860 ; K5.3@54038.05,51044.79 54062.5,50990 ; K5.2@54047.62,50801.88 54062.5,50860 ; K5.3@54047.62,51048.12 54062.5,50990 ; K5.2@54062.5,50812.5 K5.2@54062.5,50800 ; K5.3@54062.5,51050 K5.2@54062.5,50800 ; K5.2@54064.75,50785.17 54112.5,50800 ; K5.2@54064.75,50814.83 54112.5,50800 ; K5.2@54068.75,50775.79 54112.5,50800 ; K5.2@54068.75,50824.21 54112.5,50800 ; K5.2@54077.38,50801.88 54062.5,50860 ; K5.3@54077.38,51048.12 54062.5,50990 ; K5.2@54086.95,50805.21 54062.5,50860 ; K5.3@54086.95,51044.79 54062.5,50990 ; K6.2@54128.65,50850.51 54112.5,50800 ; K6.2@54137.5,50850 K6.2@54150,50837.5 54112.5,50800 ; K6.2@54138,50846.5 54112.5,50800 ; K6.2@54159,50825.5 54112.5,50800 ; K6.2@54163.01,50816.15 54112.5,50800 ; K7.2@54638.05,50805.21 54662.5,50860 ; K7.3@54638.05,51044.79 54662.5,50990 ; K7.2@54638.29,50806.25 54662.5,50850 ; K7.2@54647.62,50801.88 54662.5,50860 ; K7.3@54647.62,51048.12 54662.5,50990 ; K7.2@54647.67,50802.25 54662.5,50850 ; K7.3@54662.5,51050 K7.2@54662.5,50800 54662.5,50850 ; K7.2@54677.33,50802.25 54662.5,50850 ; K7.2@54677.38,50801.88 54662.5,50860 ; K7.3@54677.38,51048.12 54662.5,50990 ; K7.2@54686.71,50806.25 54662.5,50850 ; K7.2@54686.95,50805.21 54662.5,50860 ; K7.3@54686.95,51044.79 54662.5,50990 ; K8.2@54740.18,50814.51 54688.9,50850 ; K8.2@54745.25,50823.27 54688.9,50850 ; K8.2@54748.8,50852.45 54812,50850 ; K8.2@54751.22,50852.45 54688.9,50850 ; K8.2@54754.69,50823.25 54812,50850 ; K8.2@54759.69,50814.45 54812,50850 ; K8.3@54990.19,50814.5 54938.83,50850 ; K8.3@54995.25,50823.27 54938.83,50850 ; K8.3@55000,50837.5 54938.83,50850 ; K8.3@55000,50862.5 54938.83,50850 ; K8.3@55001.22,50852.45 54938.83,50850 ; K8.3@55025,50850 54662.5,50850 ; 53650,51650 R18.1@53700,51650 53650,51650 ; K5.2@54062.5,50800 54112.5,50800 ; 54688.9,50850 K8.2@54750,50837.5 54812,50850 ; 54688.9,50850 54750,50862.5 54812,50850
SEG2: R15.1 R15.3 U2.20 | length 1388.3
  TopLayer w10: R15.1@53700,51725 R15.3@53800,51725 ; R15.1@53700.91,51715.04 53755,51725 ; R15.1@53700.91,51734.96 53755,51725 ; R15.1@53703.64,51705.33 53755,51725 ; R15.1@53703.64,51744.67 53755,51725 ; R15.3@53796.19,51704.77 53744.41,51725 ; R15.3@53796.19,51745.23 53744.41,51725 ; R15.3@53798.99,51714.46 53744.41,51725 ; R15.3@53798.99,51735.54 53744.41,51725
  BottomLayer w10: U2.20@53595.39,51725.59 53665.48,51725 ; U2.20@53596.04,51715.5 53665.48,51725 ; U2.20@53598.1,51705.69 53665.48,51725 ; U2.20@53600,51725 R15.1@53700,51725 ; U2.20@53602.38,51694.49 53665.48,51725 ; U2.20@53607.38,51685.8 53665.48,51725 ; U2.20@53613.62,51677.85 53665.48,51725 ; 53625,51725 U2.20@53600,51700 53665.48,51725 ; R15.1@53696.36,51705.33 53645,51725 ; R15.1@53696.36,51744.67 53645,51725 ; R15.1@53699.09,51715.04 53645,51725 ; R15.1@53699.09,51734.96 53645,51725
SEG3: R13.1 R13.3 U2.21 | length 1228.4
  TopLayer w10: R13.1@53700,51800 R13.3@53800,51800 ; R13.1@53700.91,51790.04 53755,51800 ; R13.1@53700.91,51809.96 53755,51800 ; R13.1@53703.64,51780.33 53755,51800 ; R13.1@53703.64,51819.67 53755,51800 ; R13.3@53796.19,51779.77 53744.41,51800 ; R13.3@53796.19,51820.23 53744.41,51800 ; R13.3@53798.99,51789.46 53744.41,51800 ; R13.3@53798.99,51810.54 53744.41,51800
  BottomLayer w10: U2.21@53600,51800 R13.1@53700,51800 ; U2.21@53600.3,51794.01 53661,51800 ; U2.21@53600.3,51805.99 53661,51800 ; U2.21@53602.1,51784.14 53661,51800 ; U2.21@53602.1,51815.86 53661,51800 ; U2.21@53605.54,51774.6 53661,51800 ; U2.21@53605.54,51825.4 53661,51800 ; R13.1@53696.36,51780.33 53645,51800 ; R13.1@53696.36,51819.67 53645,51800 ; R13.1@53699.09,51790.04 53645,51800 ; R13.1@53699.09,51809.96 53645,51800
SEG4: R12.1 R12.3 U2.22 | length 1018.7
  TopLayer w10: R12.1@53700,51875 R12.3@53800,51875 ; R12.1@53700.91,51865.04 53755,51875 ; R12.1@53700.91,51884.96 53755,51875 ; R12.1@53703.64,51855.33 53755,51875 ; R12.1@53703.64,51894.67 53755,51875 ; R12.3@53796.19,51854.77 53744.41,51875 ; R12.3@53796.19,51895.23 53744.41,51875 ; R12.3@53798.99,51864.46 53744.41,51875 ; R12.3@53798.99,51885.54 53744.41,51875
  BottomLayer w10: U2.22@53600,51900 53675,51900 R12.1@53700,51875 ; U2.22@53600.3,51894.01 53661,51900 ; U2.22@53600.3,51905.99 53661,51900 ; U2.22@53602.1,51884.14 53661,51900 ; U2.22@53602.1,51915.86 53661,51900 ; U2.22@53605.54,51874.6 53661,51900 ; U2.22@53605.54,51925.4 53661,51900
SEG5: R16.1 R16.3 U2.23 | length 1289.8
  TopLayer w10: R16.1@53700,51950 R16.3@53800,51950 ; R16.1@53700.91,51940.04 53755,51950 ; R16.1@53700.91,51959.96 53755,51950 ; R16.1@53703.64,51930.33 53755,51950 ; R16.1@53703.64,51969.67 53755,51950 ; R16.3@53796.19,51929.77 53744.41,51950 ; R16.3@53796.19,51970.23 53744.41,51950 ; R16.3@53798.99,51939.46 53744.41,51950 ; R16.3@53798.99,51960.54 53744.41,51950
  BottomLayer w10: U2.23@53600,52000 53650,52000 ; U2.23@53600.36,51994.01 53650,52000 ; U2.23@53600.36,52005.99 53650,52000 ; U2.23@53602.56,51984.21 53650,52000 ; U2.23@53602.56,52015.79 53650,52000 ; U2.23@53606.76,51974.89 53650,52000 ; U2.23@53606.76,52025.11 53650,52000 ; R16.1@53683.86,51938.19 53653.79,51996.21 ; R16.1@53692.41,51943.49 53653.79,51996.21 ; R16.1@53706.51,51957.59 53653.79,51996.21 ; R16.1@53711.81,51966.14 53653.79,51996.21 ; 53650,52000 R16.1@53700,51950 53653.79,51996.21
SEG6: R17.1 R17.3 U2.24 | length 1228.4
  TopLayer w10: R17.1@53700,52100 R17.3@53800,52100 ; R17.1@53700.91,52090.04 53755,52100 ; R17.1@53700.91,52109.96 53755,52100 ; R17.1@53703.64,52080.33 53755,52100 ; R17.1@53703.64,52119.67 53755,52100 ; R17.3@53796.19,52079.77 53744.41,52100 ; R17.3@53796.19,52120.23 53744.41,52100 ; R17.3@53798.99,52089.46 53744.41,52100 ; R17.3@53798.99,52110.54 53744.41,52100
  BottomLayer w10: U2.24@53600,52100 R17.1@53700,52100 ; U2.24@53600.3,52094.01 53661,52100 ; U2.24@53600.3,52105.99 53661,52100 ; U2.24@53602.1,52084.14 53661,52100 ; U2.24@53602.1,52115.86 53661,52100 ; U2.24@53605.54,52074.6 53661,52100 ; U2.24@53605.54,52125.4 53661,52100 ; R17.1@53696.36,52080.33 53645,52100 ; R17.1@53696.36,52119.67 53645,52100 ; R17.1@53699.09,52090.04 53645,52100 ; R17.1@53699.09,52109.96 53645,52100
SEG7: R11.1 R11.3 U2.1 | length 1670.9
  TopLayer w10: U2.1@53300,52100 53400,52100 53450,52050 53700,52050 ; U2.1@53300.3,52094.01 53361,52100 ; U2.1@53300.3,52105.99 53361,52100 ; U2.1@53302.1,52084.14 53361,52100 ; U2.1@53302.1,52115.86 53361,52100 ; U2.1@53305.54,52074.6 53361,52100 ; U2.1@53305.54,52125.4 53361,52100 ; R11.1@53690.04,52007.65 53636.37,52050 ; R11.1@53695.67,52015.98 53636.37,52050 ; R11.1@53700.91,52015.04 53755,52025 ; R11.1@53700.91,52034.96 53755,52025 ; R11.1@53702.97,52034.55 53636.37,52050 ; R11.1@53703.64,52005.33 53755,52025 ; R11.1@53703.64,52044.67 53755,52025 ; R11.1@53704.51,52044.48 53636.37,52050 ; R11.3@53796.19,52004.77 53744.41,52025 ; R11.3@53796.19,52045.23 53744.41,52025 ; R11.3@53798.99,52014.46 53744.41,52025 ; R11.3@53798.99,52035.54 53744.41,52025 ; R11.3@53800,52025 R11.1@53700,52025 53636.37,52050
TX: R4.1 R4.3 R9.2 R9.4 U3.3 | length 2844.4
  TopLayer w10: R4.3@53700,50150 R4.1@53800,50150 53950,50150 53975,50175 53975,50275 54050,50350 ; R9.4@53700,50500 R9.2@53800,50500 ; R4.3@53701.01,50139.46 53755.59,50150 ; R4.3@53701.01,50160.54 53755.59,50150 ; R9.4@53701.01,50489.46 53755.59,50500 ; R9.4@53701.01,50510.54 53755.59,50500 ; R4.3@53703.81,50129.77 53755.59,50150 ; R4.3@53703.81,50170.23 53755.59,50150 ; R9.4@53703.81,50479.77 53755.59,50500 ; R9.4@53703.81,50520.23 53755.59,50500 ; R4.1@53796.36,50130.33 53745,50150 ; R4.1@53796.36,50169.67 53745,50150 ; R9.2@53796.36,50480.33 53745,50500 ; R9.2@53796.36,50519.67 53745,50500 ; R4.1@53799.09,50140.04 53745,50150 ; R4.1@53799.09,50159.96 53745,50150 ; R9.2@53799.09,50490.04 53745,50500 ; R9.2@53799.09,50509.96 53745,50500 ; R4.1@53800.91,50140.04 53855,50150 ; R4.1@53800.91,50159.96 53855,50150 ; R4.1@53803.64,50130.33 53855,50150 ; R4.1@53803.64,50169.67 53855,50150 ; U3.3@54041.56,50384.48 54050,50350 ; U3.3@54050,50385.5 54050,50350 ; U3.3@54050,50431 54050,50350 ; U3.3@54058.44,50384.48 54050,50350
  BottomLayer w10: R4.1@53796.36,50130.33 53745,50150 ; R4.1@53796.36,50169.67 53745,50150 ; R9.2@53796.36,50480.33 53745,50500 ; R9.2@53796.36,50519.67 53745,50500 ; R4.1@53799.09,50140.04 53745,50150 ; R4.1@53799.09,50159.96 53745,50150 ; R9.2@53799.09,50490.04 53745,50500 ; R9.2@53799.09,50509.96 53745,50500 ; R4.1@53800,50150 53725,50150 53700,50175 53700,50475 53725,50500 R9.2@53800,50500
TXD: J2.19 R4.2 R4.4 U1.22 | length 2170
  TopLayer w10: U1.22@53000,50200 J2.19@53100,50200 53150,50150 ; U1.22@53000.3,50194.01 53061,50200 ; U1.22@53000.3,50205.99 53061,50200 ; U1.22@53002.1,50184.14 53061,50200 ; U1.22@53002.1,50215.86 53061,50200 ; U1.22@53005.54,50174.6 53061,50200 ; U1.22@53005.54,50225.4 53061,50200 ; J2.19@53085.93,50179.91 53150,50150 ; J2.19@53090.84,50188.73 53150,50150 ; J2.19@53094.95,50176 53040.47,50200 ; J2.19@53094.95,50224 53040.47,50200 ; J2.19@53098.23,50185.58 53040.47,50200 ; J2.19@53098.23,50214.42 53040.47,50200 ; J2.19@53111.27,50209.16 53150,50150 ; J2.19@53120.09,50214.07 53150,50150 ; R4.2@53496.36,50130.33 53445,50150 ; R4.2@53496.36,50169.67 53445,50150 ; R4.2@53499.09,50140.04 53445,50150 ; R4.2@53499.09,50159.96 53445,50150 ; R4.2@53500.91,50140.04 53555,50150 ; R4.2@53500.91,50159.96 53555,50150 ; R4.2@53503.64,50130.33 53555,50150 ; R4.2@53503.64,50169.67 53555,50150 ; R4.4@53596.19,50129.77 53544.41,50150 ; R4.4@53596.19,50170.23 53544.41,50150 ; R4.4@53598.99,50139.46 53544.41,50150 ; R4.4@53598.99,50160.54 53544.41,50150 ; R4.4@53600,50150 R4.2@53500,50150 53150,50150
UD+: J4.3 J8.3 U3.5 | length 2051.8
  BottomLayer w10: v1@54140.2,50398 54150,50375 ; v1(54150,50400) 54150,50375 ; v1@54159.8,50398 54150,50375 ; J8.3@55050.55,50110.21 55075,50165 ; J8.3@55060.12,50106.88 55075,50165 ; J8.3@55075,50100 55075,50300 ; J8.3@55075,50105 55075,50165 ; J8.3@55089.88,50106.88 55075,50165 ; J8.3@55099.45,50110.21 55075,50165 ; J4.3@55149.89,50393.24 55175,50350 ; J4.3@55159.21,50397.44 55175,50350 ; J4.3@55169.01,50399.64 55175,50350 ; J4.3@55180.99,50399.64 55175,50350 ; J4.3@55190.79,50397.44 55175,50350 ; J4.3@55200.11,50393.24 55175,50350 ; 54150,50375 54225,50300 55075,50300 ; 55075,50300 55125,50300 55175,50350 ; 55175,50350 J4.3@55175,50400 55175,50350
UD-: J4.2 J8.2 U3.6 | length 2376.2
  TopLayer w10: U3.6@54200,50431 U3.6@54200,50450 ; J8.2@54950.55,50110.21 54975,50165 ; J8.2@54960.12,50106.88 54975,50165 ; J8.2@54975,50100 54975,50200 55100,50325 J4.2@55100,50400 ; J8.2@54975,50105 54975,50165 ; J8.2@54989.88,50106.88 54975,50165 ; J8.2@54999.45,50110.21 54975,50165 ; J4.2@55074.6,50394.46 55100,50339 ; J4.2@55084.14,50397.9 55100,50339 ; J4.2@55094.01,50399.7 55100,50339 ; J4.2@55105.99,50399.7 55100,50339 ; J4.2@55115.86,50397.9 55100,50339 ; J4.2@55125.4,50394.46 55100,50339
  BottomLayer w10: v1(54200,50400) 54600,50400 54650,50450 55000,50450 55050,50400 ; v1@54201.02,50390.05 54249,50400 v1@54201.02,50409.95 ; J4.2@55093.24,50374.89 55050,50400 ; J4.2@55093.24,50425.11 55050,50400 ; J4.2@55097.44,50384.21 55050,50400 ; J4.2@55097.44,50415.79 55050,50400 ; J4.2@55099.64,50394.01 55050,50400 ; J4.2@55099.64,50405.99 55050,50400 ; J4.2@55100,50400 55050,50400
V33: C8.2 C15.1 J5.2 U3.4 | length 1991.1
  BottomLayer w10: v1@54094,50483 54125,50500 ; v1(54100,50475) 54125,50500 ; v1@54108,50469 54125,50500 ; C15.1@54696.36,50480.33 54645,50500 ; C15.1@54696.36,50519.67 54645,50500 ; C15.1@54699.09,50490.04 54645,50500 ; C15.1@54699.09,50509.96 54645,50500 ; C15.1@54700.91,50490.04 54755,50500 ; C15.1@54700.91,50509.96 54755,50500 ; C15.1@54703.64,50480.33 54755,50500 ; C15.1@54703.64,50519.67 54755,50500 ; J5.2@54775.55,50639.79 54800,50585 ; J5.2@54785.12,50643.12 54800,50585 ; 54800,50500 J5.2@54800,50650 ; J5.2@54800,50645 54800,50585 ; J5.2@54814.88,50643.12 54800,50585 ; J5.2@54824.45,50639.79 54800,50585 ; C8.2@54896.36,50480.33 54845,50500 ; C8.2@54896.36,50519.67 54845,50500 ; C8.2@54899.09,50490.04 54845,50500 ; C8.2@54899.09,50509.96 54845,50500 ; C8.2@54900,50500 54125,50500
VCC: C1.2 C2.1 C4.1 C5.1 C6.1 C7.1 C9.2 C10.2 C12.2 C14.2 D14.1 J1.18 J6.9 J7.1 Kp.2 pad.0@51800,52000 pad.0@52900,52000 pad.32@53500,50925 pad.33@55200,53300 pad.34@55300,53300 Q5.1 R1.1 R1.3 Rp1.1 Rp2.1 U1.18 U2.2 U5.7 | length 18531.5
  TopLayer w20: U5.7@54420.34,53795.5 54450,53700 U5.7@54479.66,53795.5 ; U5.7@54450,53800 54450,53650 54450,53350 54500,53300 pad.33@55200,53300 ; pad.33@55197.78,53280.12 55110,53300 pad.33@55197.78,53319.88 ; pad.33@55198.25,53280.08 pad.34@55288.91,53282.13 ; pad.33@55198.25,53319.92 pad.34@55288.91,53317.87 ; pad.33@55202.22,53280.12 55290,53300 pad.33@55202.22,53319.88 ; pad.33@55206.08,53280.95 pad.34@55288.91,53317.87 ; pad.33@55206.08,53319.05 pad.34@55288.91,53282.13 ; pad.34@55297.78,53280.12 55210,53300 pad.34@55297.78,53319.88 ; pad.34@55302.22,53280.12 55390,53300 pad.34@55302.22,53319.88 ; D14.1@55484.21,53302.56 55500,53350 ; D14.1@55493.51,53284.07 55409,53300 ; D14.1@55493.51,53315.93 55409,53300 ; D14.1@55495,53300 55409,53300 ; D14.1@55515.79,53302.56 55500,53350 ; J7.1@55580.85,53496.19 55600,53450 ; J7.1@55600,53500 55600,53450 ; J7.1@55619.15,53496.19 55600,53450 ; pad.33@55200,53300 pad.34@55288.91,53282.13 ; pad.33@55200,53300 pad.34@55288.91,53317.87 ; pad.33@55200,53300 pad.34@55300,53300 D14.1@55500,53300 55500,53350 ; 55500,53350 55600,53450
  TopLayer w30: J6.9@51784.32,50999.48 51800,50879.5 ; J6.9@51800,50990 51800,50430 51830,50400 52080,50400 52100,50380 C5.1@52100,50300 ; J6.9@51800.29,51000.5 51800,50879.5 ; J6.9@51816.25,50999.4 51800,50879.5 ; Rp1.1@51892.89,51980.11 pad.0@51800,52000 ; Rp1.1@51892.89,52019.89 pad.0@51800,52000 ; Rp1.1@51895,52000 pad.0@51800,52000 ; C4.1@51900,52200 C12.2@52100,52200 52100,52100 ; Rp1.1@51905,52000 52030,52000 ; Rp1.1@51906.6,51980.06 52030,52000 ; Rp1.1@51906.6,52019.94 52030,52000 ; Rp2.1@52080.16,52002.5 52100,52080 ; Rp2.1@52093.4,51980.06 51970,52000 ; Rp2.1@52093.4,52019.94 51970,52000 ; Rp2.1@52095,52000 51970,52000 ; Rp2.1@52100,51990 Rp2.1@52100,52000 ; Rp2.1@52119.84,52002.5 52100,52080 ; 52500,51975 52500,52075 52486.98,52088.02 52480,52095 ; 52685,52575 Q5.1@52800,52575 52525,52575 52480,52530 52480,52095 ; pad.0@51800,52000 Rp2.1@52100,52000 ; Rp2.1@52100,52000 52100,52080 ; 52100,52080 52120,52100 52475,52100 52480,52095
  TopLayer w50: U1.18@52400,50300 52475,50300 ; 52500,50025 52500,50275 52475,50300 ; 52500,50300 52475,50300 ; U2.2@53300,52000 53475,52000 53487.5,51987.5 ; R1.3@53350,50575 R1.1@53350,50675 53350,50750 53400,50800 53475,50800 53500,50825 pad.32@53500,50925 ; 53500,51975 pad.32@53500,50925 ; C9.2@53680,50925 pad.32@53500,50925 ; Kp.2@55425,50825 55425,50900 ; Kp.2@55425,50825.24 55425,50900 ; C2.1@55525,51200 C1.2@55350,51200 55225,51200 55150,51125 55150,50925 ; pad.32@53500,50925 C9.2@53700,50925 55150,50925 ; 55150,50925 55400,50925 55425,50900
  BottomLayer w20: 53220,52075 53220,52120 53275,52175 53350,52250 53375,52275 53800,52275 53825,52300 53825,52375 53850,52400 54425,52400 54450,52425 C7.1@54450,52600 C14.2@54450,52800 U5.7@54450,53800 54450,53700 ; U5.7@54420.34,53795.5 54450,53700 ; C7.1@54435.06,52598.68 54450,52515 C7.1@54464.94,52598.68 ; C7.1@54435.06,52601.32 54450,52685 C7.1@54464.94,52601.32 ; C14.2@54435.06,52798.68 54450,52715 C14.2@54464.94,52798.68 ; C14.2@54435.06,52801.32 54450,52885 C14.2@54464.94,52801.32 ; U5.7@54479.66,53795.5 54450,53700
  BottomLayer w30: C5.1@52106,50300 52221,50300 ; J1.18@52300,50300 C5.1@52100,50300 ; C9.2@53700,50925 C6.1@53700,51100 ; 53700,50979 C6.1@53700,51094 ; C5.1@52100,50300 C10.2@52100,50200 C5.1@52100,50300
  BottomLayer w50: J1.18@52300,50300 U1.18@52400,50300 ; pad.0@52900,52000 52900,52100 53175,52100 53200,52075 53200,52025 53225,52000 U2.2@53300,52000
VCCU: C3.2 C11.1 C17.1 D9.1 D10.1 D11.1 J4.1 J5.1 J8.1 Kp.1 U3.16 | length 7561.6
  TopLayer w20: v2@55165.21,51286.36 55246.43,51346.43 v2@55186.36,51265.21 ; v2(55175,51275) 55250,51350 55250,51625 55275,51650 55277.88,51650 55278.88,51649 55321.12,51649 55322.12,51650 55325,51650 55375,51700 v2(55375,52500) ; v2@55360.05,52498.74 55375,52411 v2@55389.95,52498.74
  TopLayer w30: J5.1@54700,50650 54700,50600 ; 55100,50565 54735,50565 ; 54700,50600 J5.1@54700,50645 ; 54700,50600 J5.1@54700,50645 ; 54700,50600 54735,50565 ; J5.1@54700,50645 54735,50565
  TopLayer w50: C11.1@54450,50450 C3.2@54450,50625 ; J8.1@54875,50100 54875,50250 ; J8.1@54875,50105 54875,50250 ; C17.1@55104,50750 55135,50825 ; 55138.58,50825 Kp.1@55325,50825 ; Kp.1@55300.24,50825 55135,50825 ; 54875,50250 55000,50375 55000,50475 55025,50500 J4.1@55100,50500 55100,50565 C17.1@55100,50750 ; C17.1@55100,50750 55100,50790 ; C17.1@55100,50750 55100,50790 ; 55100,50790 55135,50825
  BottomLayer w20: v2@55160.05,51273.74 55175,51186 v2@55189.95,51273.74 ; v2(55175,51275) 55175,50850 55200,50825 Kp.1@55300.24,50825 ; Kp.1@55321.38,50798.83 55228.58,50825 ; Kp.1@55321.38,50851.17 55228.58,50825 ; Kp.1@55325,50825 55228.58,50825 ; v2@55360.05,52501.26 55375,52589 v2@55389.95,52501.26 ; v2(55375,52500) 55375,53075 55400,53100 D11.1@55500,53100 ; D11.1@55493.51,53084.07 55409,53100 ; D11.1@55493.51,53115.93 55409,53100 ; D11.1@55495,53100 55409,53100
  BottomLayer w50: D9.1@53525,50700 D10.1@53750,50700 v1(53950,50700) 54450,50700 ; C3.2@54450,50625 54450,50700 ; J5.1@54700,50650 54675,50650 54625,50700 ; J5.1@54700,50655 54625,50700 ; 54450,50700 54625,50700
pads on no net: J4.5 J4.6 Kp.3 Kp.4 Kp.5 Kp.6 U2.17 U3.9 U3.10 U3.11 U3.12 U3.13 U3.14 U3.15

## Polygon pours and split planes (outlines as drawn)
VCC on TopLayer "VCC" (solid, pour order 1000): 52475,50000 52925,50000 52925,52050 52475,52050

## Keep-outs
KeepOutLayer:
  the board outline again, w2

## Other copper
TopLayer:
  text "oooooooooo" at 52045,53775 h30
  text "1234567890" at 52045,53675 h30
  text "oooooooooo" at 52045,53600 h30
  text "mdm3" at 55600,52325 h30 r90

## Silkscreen, mask and mechanical layers (free items; w line width, h text height)
TopOverlay:
  lines w5: 53650,53725 53650,52250 55350,52250 55350,53725
  text "SCM-P" at 55500,53400 h30
  text "USB-P" at 55500,52950 h30
  text "mdm3" at 55600,52330 h30 r90
  text "V-in" at 52050,51475 h30
  text "gnd" at 51875,50875 h30
  text "s-txd" at 53400,50775 h30
  text "5V 3.3V GND" at 54655,50715 h30
  text "s-rxd" at 53886.62,50563.38 h30 r90
  text "gnd" at 53475,49975 h30
  text "gnd" at 53775,49975 h30
  text "2017-03-10" at 54950,49975 h30